# Altium PCB MIFA.PcbDoc (part 5 of 5)
Units mm, origin at the board's own origin, x right, y up, seen from the top; angles counter-clockwise.
Board outline 61 x 65 mm, 6 copper layers (Top Layer, Mid-Layer 1, Mid-Layer 2, Mid-Layer 3, Mid-Layer 4, Bottom Layer), stack 1.538 mm thick; 269 components, 171 nets, 1183 pads, 797 vias.
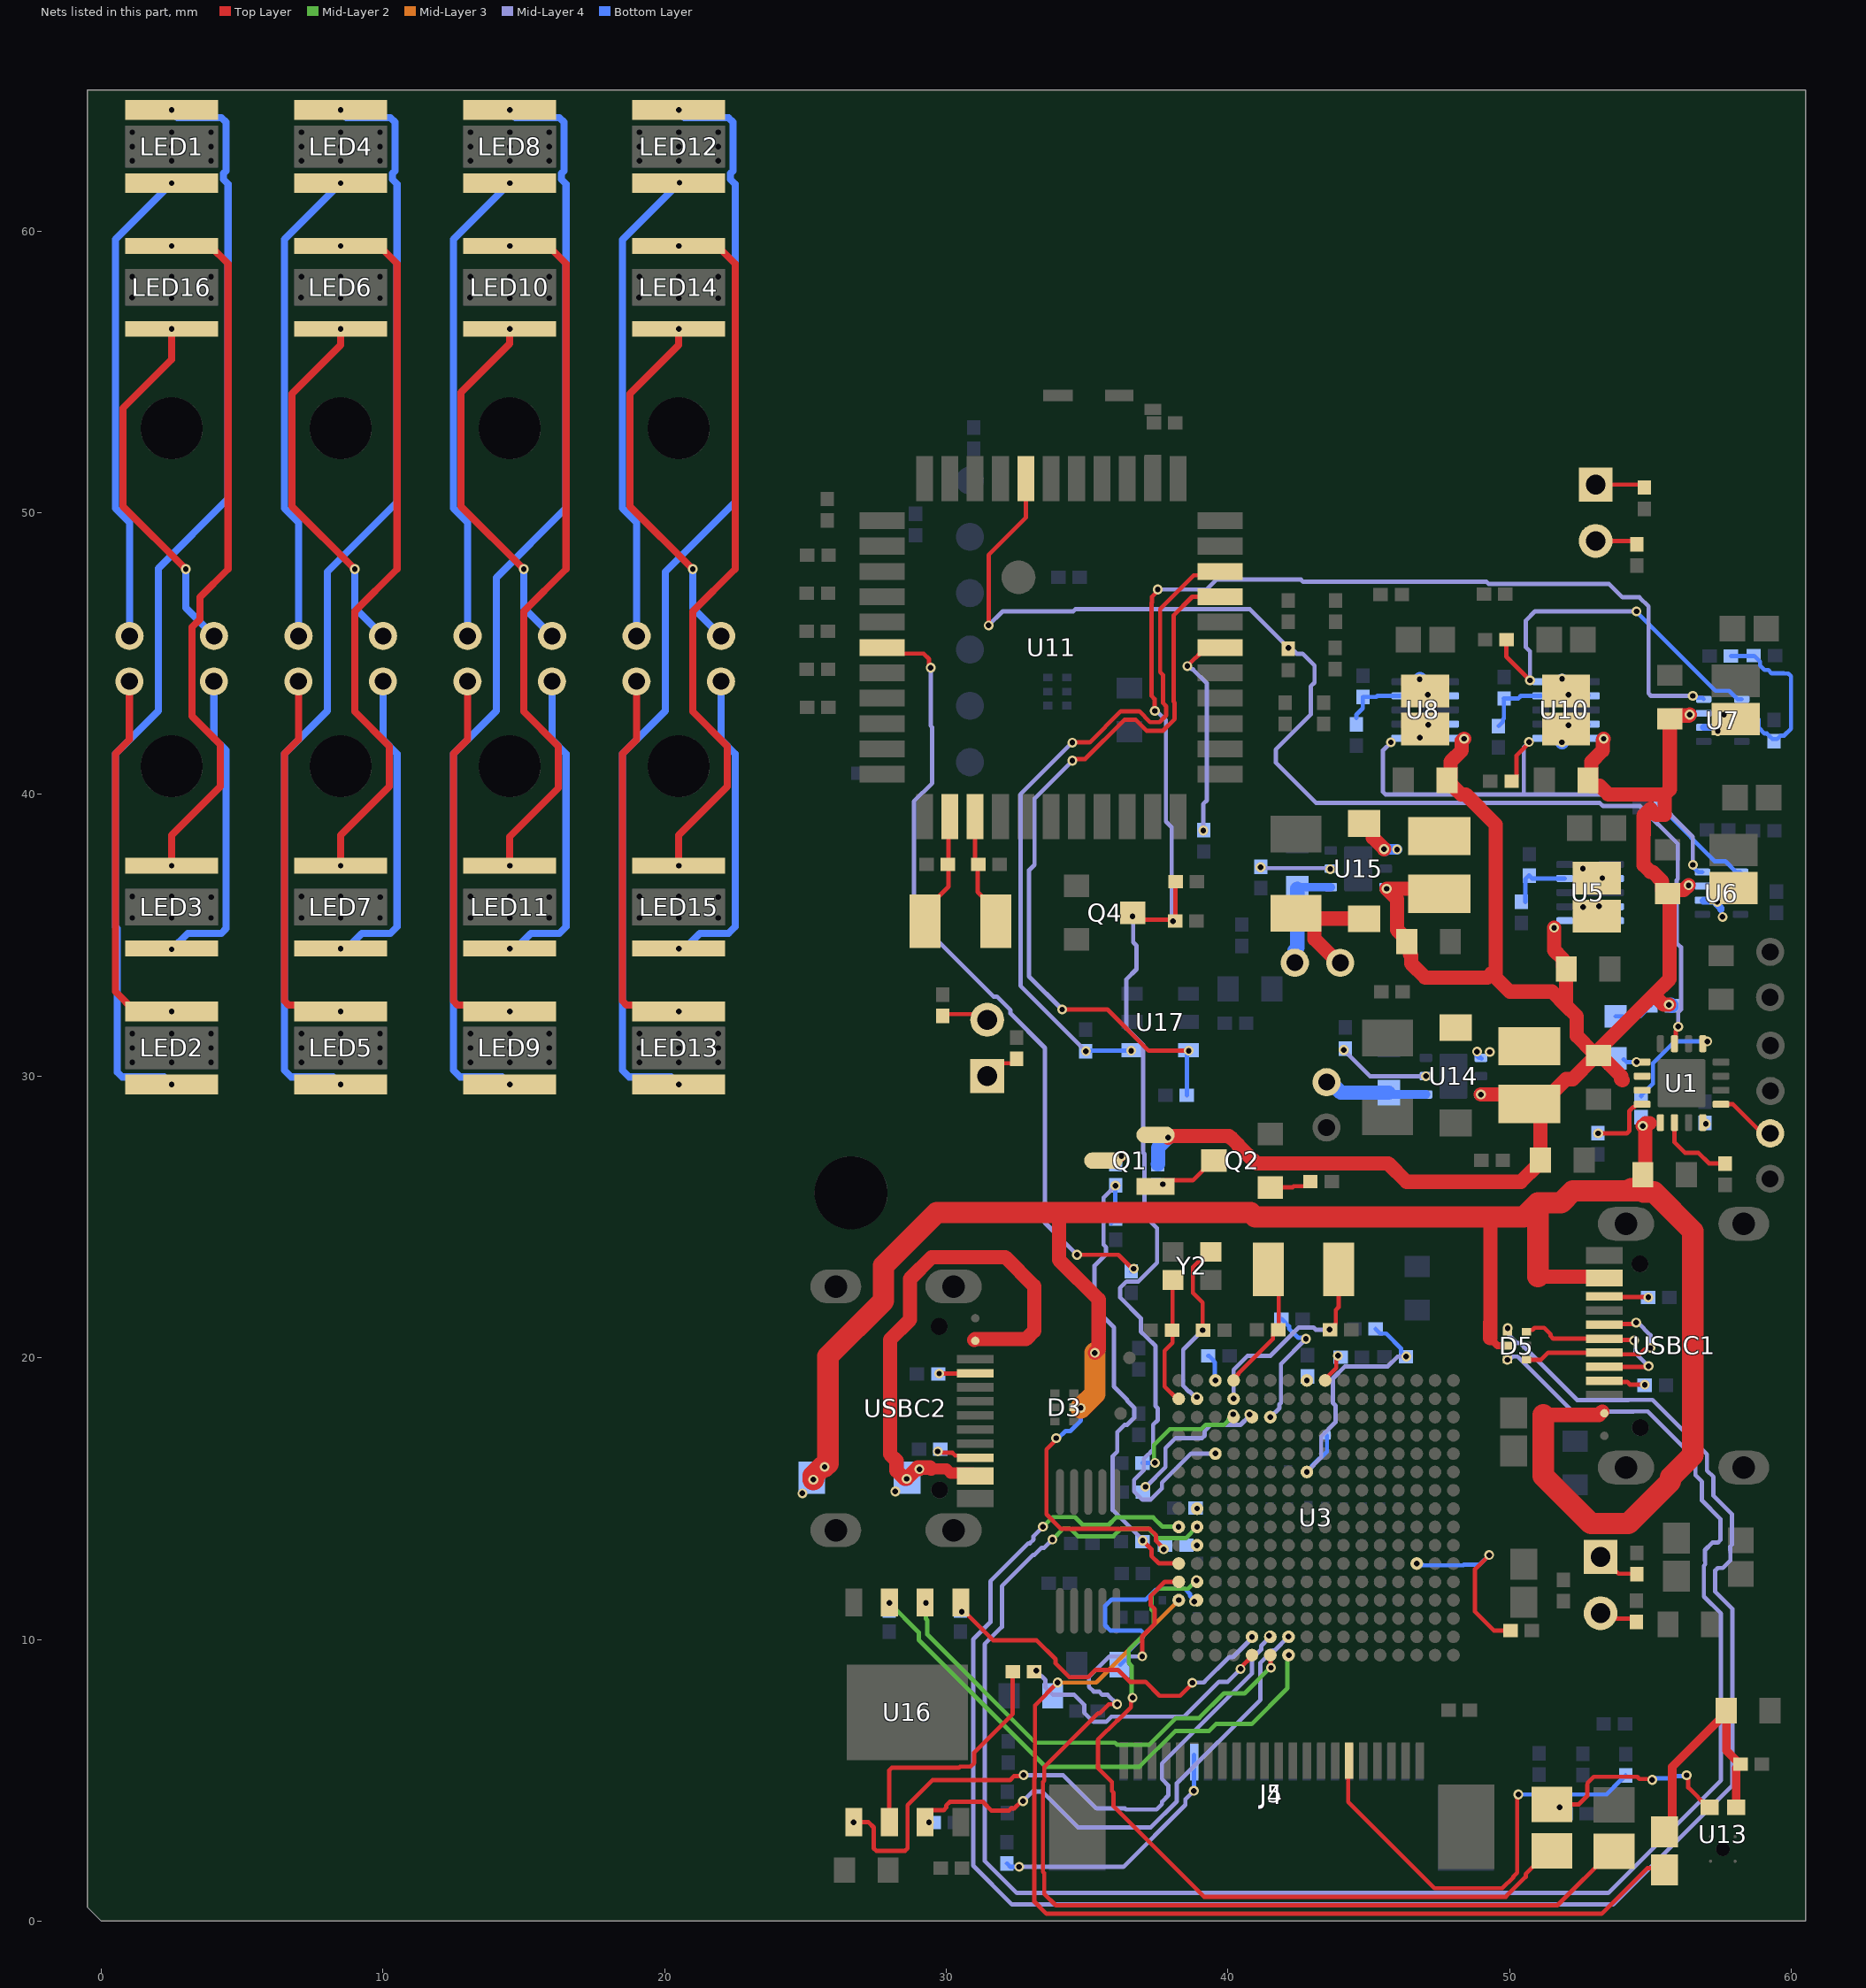
[diagram p7: the nets of this part, all layers, seen from the top]

## Via types
v1: diameter 0.35, hole 0.2, Top Layer to Bottom Layer, tented both sides, 788 vias
v2: diameter 0.35, hole 0.2, Top Layer to Bottom Layer, 9 vias

## Nets (pads, with @x,y where several pads share a name; then routed paths per layer and width w, separated by ;. In a path a pad name is that pad's centre, name@x,y a point inside that pad or via, vN(x,y) a via of type N, cw(c..) or ccw(c..) an arc to the next point about the centre after c; other vN are vias at no path point) (continued)
NetC22_2: C22.2 R26.1 R29.2 U7.2 | length 6.8
  Bottom Layer w0.152: R26.1@57.852,44.914 58.645,44.914 58.654,44.923 58.676,44.923 58.887,44.712 58.887,44.576 59.043,44.42 59.178,44.42 59.3,44.298 59.724,44.298 59.727,44.296 59.883,44.296 59.984,44.194 59.984,42.334 59.742,42.092 59.624,42.092 59.5,41.968 59.319,41.968 59.215,42.072 59.215,42.075 59.126,42.164 59.045,42.164 58.833,42.376 58.833,42.667 58.622,42.878 58.238,42.878 U7.2@58.235,42.881
NetC37_1: C37.1 R33.2 R46.1 U3.H11 | length 9.9
  Mid-Layer 4 w0.152: v1(42.798,15.952) 43.307,16.461 43.307,17.207 43.817,17.717 43.817,18.298 43.722,18.393 43.722,19.268 44.152,19.698 45.671,19.698 46.018,20.046 v1(46.325,20.046)
  Bottom Layer w0.152: v1(42.798,15.952) 42.798,15.97 42.968,16.14 42.968,16.15 43.249,16.431 43.277,16.431 43.51,16.664 C37.1@43.51,17.246 ; R46.1@45.239,21.025 45.399,20.865 45.61,20.865 46.137,20.337 46.137,20.202 46.293,20.046 v1(46.325,20.046)
NetC92_1: C92.1 R59.1 R61.2 U3.A6 | length 17.7
  Top Layer w0.152: v1(36.971,13.512) 37.246,13.238 37.279,13.204 37.279,13.141 37.281,13.139 37.281,12.97 37.551,12.699 U3.A6@38.248,12.699
  Mid-Layer 4 w0.152: v1(36.004,26.113) 35.58,25.689 35.58,24.016 35.671,23.925 35.671,23.682 35.258,23.269 35.258,21.77 35.95,21.077 35.95,18.979 36.421,18.508 36.421,18.476 36.671,18.226 36.671,17.873 36.421,17.623 36.329,17.623 36.069,17.364 36.069,16.673 35.906,16.51 35.906,14.594 36.971,13.529 v1(36.971,13.512)
  Bottom Layer w0.152: R61.2@35.86,24.782 35.86,25.117 35.986,25.117 36,25.131 R59.1@36,26.121 ; C92.1@36.957,13.472 36.971,13.486 v1(36.971,13.512)
NetC95_2: C95.2 C96.1 FB4.1 U13.1 | length 9.2
  Top Layer w0.152: C96.1@57.687,7.399 C96.1@57.687,7.474 ; C95.2@58.041,5.443 C95.2@58.171,5.573
  Top Layer w0.305: FB4.1@55.5,2.775 55.771,3.046 55.771,5.482 57.687,7.399 57.687,6.057 C95.2@58.171,5.573 ; U13.1@58.041,4.044 C95.2@58.041,5.443
NetC97_1: C97.1 C98.1 U13.2 | length 7.1
  Top Layer w0.152: C97.1@51.5,4.15 51.776,4.15 52.454,4.15 52.752,4.449 52.752,4.845 52.762,4.855 52.762,4.901 52.986,5.125 54.527,5.125 54.603,5.049 55.026,5.049 v1(55.057,5.018) ; v1(56.279,5.183) 56.336,5.126 56.336,4.747 57.039,4.044 U13.2@57.091,4.044
  Bottom Layer w0.152: v1(55.057,5.018) 55.11,5.072 55.749,5.072 55.825,5.148 56.243,5.148 v1(56.279,5.183)
  other v1: 51.776,4.04
NetC97_2: C97.2 U3.B5 | length 28.1
  Top Layer w0.152: v1(36.612,7.932) 36.555,7.876 36.555,7.591 36.089,7.126 36.063,7.126 35.378,6.442 35.378,5.444 35.879,4.944 35.879,4.621 35.939,4.561 35.939,4.078 39.15,0.867 49.86,0.867 50.568,1.575 50.568,1.668 51.4,2.5 C97.2@51.5,2.5
  Mid-Layer 2 w0.152: v1(36.612,7.932) 36.573,7.971 36.573,9.069 36.473,9.17 36.473,9.631 36.826,9.984 37.36,10.517 37.36,10.981 37.281,11.06 37.281,11.573 37.508,11.8 38.575,11.8 v1(38.876,12.102)
NetC99_1: C99.1 C100.1 U3.B4 | length 7.3
  Bottom Layer w0.152: C99.1@36.174,9.106 36.473,9.405 36.473,9.585 36.826,9.938 36.994,10.106 36.994,10.232 36.905,10.321 35.82,10.321 35.635,10.507 35.635,11.185 35.87,11.42 37.084,11.42 37.435,11.771 37.478,11.771 37.508,11.8 38.469,11.8 38.65,11.619 38.65,11.55 C100.1@38.796,11.404 ; v1(38.797,11.349) 38.877,11.349 C100.1@38.892,11.364
NetC101_2: C101.2 U3.A5 | length 36.6
  Top Layer w0.152: v1(36.063,7.703) 35.765,7.703 35.436,7.374 35.374,7.374 33.478,5.478 33.478,4.994 33.428,4.944 33.428,1.757 33.478,1.707 33.478,0.969 33.882,0.564 51.692,0.564 53.603,2.476 C101.2@53.703,2.476 ; v1(36.955,9.402) 36.955,10.114 37.399,10.559 37.399,11.073 37.256,11.216 37.256,11.548 37.751,12.043 38.243,12.043 U3.A5@38.249,12.049
  Mid-Layer 4 w0.152: v1(36.063,7.703) 35.727,8.039 35.539,8.039 35.426,8.152 35.229,8.152 35.063,8.318 35.063,8.671 35.789,9.397 36.95,9.397 v1(36.955,9.402)
NetC103_1: C103.1 U14.2 | length 3.3
  Mid-Layer 4 w0.152: v1(44.106,30.928) 45.034,30 v1(47.025,30)
NetC104_1: C104.1 D8.1 J2.1 | length 4.5
  Top Layer w0.508: C104.1@42.418,35.788 42.613,35.593 42.941,35.593 D8.1@44.769,35.593 ; C104.1@42.738,35.593 42.863,35.593 43.067,35.39 43.067,34.866 J2.1@43.899,34.034
NetC107_1: C107.1 U15.2 | length 2.5
  Mid-Layer 4 w0.152: v1(41.156,37.414) 41.188,37.381 43.598,37.381 v1(43.63,37.349)
  Bottom Layer w0.152: U15.2@43.586,37.348 U15.2@43.588,37.348
NetC111_2: C111.2 U11.24 Y3.1 | length 4.1
  Top Layer w0.152: Y3.1@29.25,35.5 29.25,35.9 30.076,36.726 30.076,37.517 30.076,39.172 U11.24@30.121,39.218
NetC112_1: C112.1 U11.25 Y3.2 | length 4
  Top Layer w0.152: U11.25@31.021,39.218 31.021,37.605 31.113,37.512 31.113,36.537 31.75,35.9 Y3.2@31.75,35.5
NetCB1_1: CB1.1 CB2.1 FB4.2 U3.A4 | length 36.8
  Top Layer w0.152: v1(33.953,8.47) 33.144,7.662 33.144,5.088 33.125,5.069 33.125,0.69 33.554,0.262 53.262,0.262 54.882,1.882 55.157,1.882 FB4.2@55.346,2.071
  Mid-Layer 3 w0.152: v1(33.953,8.47) 35.32,8.47 v1(38.249,11.399)
  Bottom Layer w0.152: CB2.1@38.213,11.399 v1(38.249,11.399)
NetD1_1: D1.1 U1.9 | length 0.5
  Bottom Layer w0.152: D1.1@54.041,30.6 54.141,30.5 v1(54.5,30.5)
NetD1_2: D1.2 R12.1 | length 1.4
  Bottom Layer w0.152: D1.2@53.758,32.124 54.624,32.124 54.819,32.319 54.819,32.34 54.979,32.5 R12.1@55,32.5
NetD2_2: D2.2 USBC2.A4B9 USBC2.B4A9 | length 19.5
  Top Layer w0.4: 29.459,16.06 29.997,16.06 30.153,15.905 30.926,15.905 USBC2.B4A9@31.026,15.805
  Top Layer w0.508: v1(29.042,16.047) v1@28.984,16.105 ; 29.459,16.06 29.414,16.105 v1@28.984,16.105 ; USBC2.A4B9@30.987,20.633 31.015,20.661 32.823,20.661 33.121,20.959 33.121,22.543 32.089,23.575 29.481,23.575 28.709,22.802 28.709,21.353 28,20.644 28,16.579 28.232,16.348 28.232,15.993 28.519,15.705 v1(28.59,15.705) 28.984,16.099 v1@28.984,16.105
  other v1: 28.187,15.254
NetD7_2: D7.2 L6.2 U14.4 | length 0.4
  Bottom Layer w0.152: v1@48.826,30.896 48.826,30.724 48.9,30.65 U14.4@48.975,30.65 U14.4@48.999,30.626
  other v1: 48.837,30.872 49.288,30.861
NetD8_2: D8.2 L7.2 U15.4 | length 1.6
  Top Layer w0.508: D8.2@44.952,38.943 45.146,38.749 45.146,38.463 45.536,38.072 v1(45.536,38.058)
  Bottom Layer w0.381: v1(45.536,38.058) 45.581,38.013 U15.4@45.596,38.013 ; U15.4@45.596,38.013 45.63,38.048 v1(46.001,38.048)
NetJ1_2: J1.2 R66.2 U14.1 | length 3.7
  Bottom Layer w0.152: R66.2@45.706,29.415 R66.2@45.77,29.35
  Bottom Layer w0.305: R66.2@45.77,29.35 U14.1@47.025,29.35
  Bottom Layer w0.508: J1.2@43.5,29.787 43.633,29.787 44.006,29.415 R66.2@45.706,29.415
NetJ2_2: J2.2 R68.2 U15.1 | length 3.9
  Bottom Layer w0.152: R68.2@42.461,36.654 R68.2@42.521,36.713
  Bottom Layer w0.305: R68.2@42.521,36.713 U15.1@43.646,36.713
  Bottom Layer w0.508: J2.2@42.264,34.012 42.359,34.106 42.359,34.453 42.461,34.556 R68.2@42.461,36.654
NetJ3_1: J3.1 LED1.1 | length 17.1
  Bottom Layer w0.254: J3.1@1.004,45.625 1.004,49.656 0.5,50.16 0.5,59.702 v1(2.5,61.702)
NetJ3_2: J3.2 LED2.2 | length 13.5
  Top Layer w0.254: J3.2@1,44.013 1,41.942 0.5,41.442 0.5,33.001 1.201,32.3 v1(2.5,32.3)
NetJ4_17: J4.17 R13.1 | length 9.2
  Mid-Layer 4 w0.152: v1(32.584,1.929) 36.284,1.929 38.486,4.131 38.486,4.33 v1(38.785,4.628)
  Bottom Layer w0.152: R13.1@32.151,2.047 32.269,1.929 v1(32.584,1.929) ; v1(38.785,4.628) 38.79,4.633 38.79,5.9 J4.17@38.795,5.905
NetJ5_17: J5.17 R16.1 | length 16.1
  Top Layer w0.152: J5.17@44.263,5.918 44.263,4.237 47.331,1.169 49.735,1.169 50.134,1.568 50.134,1.591 50.266,1.722 50.266,4.456 v1(50.308,4.498)
  Bottom Layer w0.152: v1(50.308,4.498) 53.435,4.498 53.932,4.995 53.953,4.995 54.113,5.155 R16.1@54.113,5.177
NetJ6_1: J6.1 LED16.3 | length 13
  Top Layer w0.254: v1(2.5,56.529) 2.5,55.442 0.773,53.715 0.773,50.227 v1(3,48)
  Bottom Layer w0.254: v1(3,48) 3,46.63 J6.1@4.004,45.625
NetJ6_2: J6.2 LED3.1 | length 11.2
  Bottom Layer w0.254: v1(2.5,34.5) 3.073,35.073 4.264,35.073 4.427,35.235 4.427,41.573 4,42 J6.2@4,44.013
NetJ7_1: J7.1 LED4.1 | length 17.1
  Bottom Layer w0.254: J7.1@7.004,45.625 7.004,49.656 6.5,50.16 6.5,59.702 v1(8.5,61.702)
NetJ7_2: J7.2 LED5.2 | length 13.7
  Top Layer w0.254: J7.2@7,44.013 7,41.942 6.5,41.442 6.5,32.673 6.649,32.524 8.276,32.524 v1(8.5,32.3)
NetJ8_1: J8.1 LED6.3 | length 13
  Top Layer w0.254: v1(8.5,56.529) 8.5,55.956 6.773,54.229 6.773,50.227 v1(9,48)
  Bottom Layer w0.254: v1(9,48) 9,46.63 J8.1@10.004,45.625
NetJ8_2: J8.2 LED7.1 | length 11.2
  Bottom Layer w0.254: v1(8.5,34.529) 8.538,34.567 8.741,34.567 9.247,35.073 10.264,35.073 10.5,35.308 10.5,41.442 10,41.942 J8.2@10,44.013
NetJ9_1: J9.1 LED8.1 | length 17.1
  Bottom Layer w0.254: J9.1@13.004,45.625 13.004,49.655 12.5,50.16 12.5,59.702 v1(14.5,61.702)
NetJ9_2: J9.2 LED9.2 | length 13.7
  Top Layer w0.254: J9.2@13,44.013 13,41.942 12.5,41.442 12.5,32.673 12.649,32.524 14.276,32.524 v1(14.5,32.3)
NetJ10_1: J10.1 LED10.3 | length 13
  Top Layer w0.254: v1(14.5,56.529) 14.5,56 12.773,54.273 12.773,50.227 v1(15,48)
  Bottom Layer w0.254: v1(15,48) 15,46.63 J10.1@16.004,45.625
NetJ10_2: J10.2 LED11.1 | length 11.2
  Bottom Layer w0.254: v1(14.5,34.529) 14.538,34.567 14.741,34.567 15.247,35.073 16.264,35.073 16.5,35.308 16.5,41.442 16,41.942 J10.2@16,44.013
NetJ11_1: J11.1 LED12.1 | length 17.1
  Bottom Layer w0.254: J11.1@19.004,45.625 19.004,49.655 18.5,50.16 18.5,59.688 v1(20.529,61.717)
NetJ11_2: J11.2 LED13.2 | length 13.7
  Top Layer w0.254: J11.2@19,44.013 19,41.942 18.5,41.442 18.5,32.673 18.649,32.524 20.276,32.524 v1(20.5,32.3)
NetJ12_1: J12.1 LED14.3 | length 13
  Top Layer w0.254: v1(20.5,56.529) 20.5,55.956 18.773,54.229 18.773,50.227 v1(21,48)
  Bottom Layer w0.254: v1(21,48) 21,46.63 J12.1@22.004,45.625
NetJ12_2: J12.2 LED15.1 | length 11.2
  Bottom Layer w0.254: v1(20.5,34.529) 20.538,34.567 20.741,34.567 21.247,35.073 22.264,35.073 22.5,35.308 22.5,41.442 22,41.942 J12.2@22,44.013
NetJT_1: JT.1 U1.1 | length 2.3
  Top Layer w0.152: U1.1@57.5,29 57.925,29 JT.1@59.237,27.688
NetL1_1: L1.1 U6.6 | length 0.9
  Bottom Layer w0.152: U6.6@56.84,36.245 U6.6@56.864,36.221
  Bottom Layer w0.254: U6.6@56.864,36.221 57.275,36.221 57.337,36.158 v1@57.337,36.108 ; v1(57.365,36.188) 57.365,36.122 v1@57.351,36.108 ; 57.498,35.921 57.498,35.962 v1@57.351,36.108 ; v1@57.337,36.108 v1@57.351,36.108 ; v1@57.337,36.108 v1@57.351,36.108
  other v1: 57.556,35.653
NetL2_1: L2.1 U7.6 | length 0.7
  Bottom Layer w0.152: 57.227,42.332 57.305,42.253 v1(57.386,42.253)
  Bottom Layer w0.254: U7.6@56.885,42.381 57.205,42.381 57.333,42.253 v1(57.386,42.253)
  other v1: 57.605,42.828
NetL3_1: L3.1 U5.7 | length 1.1
  Bottom Layer w0.305: v1@52.709,37.271 52.709,37.175 52.854,37.03 v1(53.286,37.03) 53.589,37.03 U5.7@53.603,37.016
  other v1: 52.596,37.366
NetL3_2: L3.2 U5.9 | length 1.4
  Bottom Layer w0.305: v1@52.702,35.902 52.808,36.009 53.15,36.009 53.178,36.037 53.188,36.026 U5.9@53.592,36.026 ; v1(53.174,36.037) 53.185,36.026 U5.9@53.592,36.026 ; U5.9@53.592,36.026 U5.9@53.603,36.016 U5.9@53.592,36.026
  other v1: 52.603,36
NetL4_1: L4.1 U8.7 | length 1.3
  Bottom Layer w0.152: U8.7@47.73,43.52 U8.7@47.75,43.5
  Bottom Layer w0.254: v1@47.108,43.52 U8.7@47.73,43.52
  Bottom Layer w0.508: v1@46.812,44.089 46.853,44.048 46.853,43.759 47.072,43.541 v1(47.087,43.541)
  other v1: 46.802,44.089
NetL4_2: L4.2 U8.9 | length 1.3
  Bottom Layer w0.152: U8.9@47.725,42.475 U8.9@47.75,42.5
  Bottom Layer w0.254: v1(47.104,42.471) 47.13,42.471 47.184,42.525 47.674,42.525 U8.9@47.725,42.475
  Bottom Layer w0.508: v1(46.804,42.016) 46.804,42.171 v1(47.104,42.471)
NetL5_1: L5.1 U10.7 | length 1.3
  Bottom Layer w0.152: v1@51.86,44.024 v1(51.86,44.105) ; v1@52.031,43.598 v1(52.087,43.541) ; U10.7@52.73,43.52 U10.7@52.75,43.5
  Bottom Layer w0.254: v1@52.108,43.52 U10.7@52.73,43.52
  Bottom Layer w0.508: v1@51.86,44.024 51.86,43.768 v1@52.031,43.598
NetL5_2: L5.2 U10.9 | length 1.4
  Bottom Layer w0.152: U10.9@52.73,42.48 U10.9@52.75,42.5
  Bottom Layer w0.254: v1@52.108,42.48 U10.9@52.73,42.48
  Bottom Layer w0.508: v1(51.854,41.853) 51.854,42.226 v1(52.087,42.459)
NetLED1_2: LED1.2 LED2.1 | length 39.8
  Bottom Layer w0.254: v1(2.5,29.702) 2.23,29.972 0.736,29.972 0.573,30.135 0.573,35.235 0.5,35.308 0.5,41.442 2.023,42.965 2.023,48.023 4.5,50.5 4.5,61.675 4.339,61.836 4.339,62.046 4.427,62.135 4.427,63.865 4.264,64.028 2.697,64.028 2.518,64.206 2.518,64.282 v1(2.5,64.3)
NetLED3_3: LED3.3 LED16.1 | length 25.3
  Top Layer w0.254: v1(2.5,37.471) 2.5,38.558 4.227,40.285 4.227,41.773 3.223,42.777 3.223,45.943 3.5,46.22 3.5,47 4.5,48 4.5,58.841 3.87,59.471 v1(2.5,59.471)
NetLED4_2: LED4.2 LED5.1 | length 39.8
  Bottom Layer w0.254: v1(8.5,29.702) 8.23,29.972 6.736,29.972 6.5,30.208 6.5,41.442 8.023,42.965 8.023,47.907 10.5,50.384 10.5,61.675 10.339,61.836 10.339,62.046 10.427,62.135 10.427,63.865 10.264,64.028 8.697,64.028 8.518,64.206 8.518,64.282 v1(8.5,64.3)
NetLED6_1: LED6.1 LED7.3 | length 25.5
  Top Layer w0.254: v1(8.5,37.471) 8.5,38.558 10.227,40.285 10.227,41.715 9,42.942 9,46.5 10.5,48 10.5,58.841 9.87,59.471 v1(8.5,59.471)
NetLED8_2: LED8.2 LED9.1 | length 39.8
  Bottom Layer w0.254: v1(14.5,29.702) 14.23,29.972 12.736,29.972 12.5,30.208 12.5,41.442 14.023,42.965 14.023,47.698 16.5,50.175 16.5,61.675 16.339,61.836 16.339,62.046 16.427,62.135 16.427,63.865 16.264,64.028 14.697,64.028 14.518,64.206 14.518,64.282 v1(14.5,64.3)
NetLED10_1: LED10.1 LED11.3 | length 25.5
  Top Layer w0.254: v1(14.5,37.471) 14.5,38.5 16.227,40.227 16.227,41.715 15,42.942 15,46.5 16.5,48 16.5,58.841 15.87,59.471 v1(14.5,59.471)
NetLED12_2: LED12.2 LED13.1 | length 39.8
  Bottom Layer w0.254: v1(20.5,29.702) 20.23,29.972 18.736,29.972 18.5,30.208 18.5,41.442 20.023,42.965 20.023,47.907 22.5,50.384 22.5,61.675 22.339,61.836 22.339,62.046 22.427,62.135 22.427,63.865 22.264,64.028 20.697,64.028 20.518,64.206 20.518,64.282 v1(20.5,64.3)
NetLED14_1: LED14.1 LED15.3 | length 25.5
  Top Layer w0.254: v1(20.5,37.471) 20.5,38.558 22.227,40.285 22.227,41.715 21,42.942 21,46.5 22.5,48 22.5,58.841 21.87,59.471 v1(20.5,59.471)
NetQ1_1: Q1.1 Q2.3 R58.1 | length 2.6
  Top Layer w0.152: Q1.1@37.427,26.085 Q1.1@37.505,26.163 ; v1(37.682,26.163) Q1.1@37.505,26.163 ; Q2.3@39.5,27 39.45,27 38.752,26.302 37.644,26.302 Q1.1@37.505,26.163
NetQ1_3: Q1.3 R59.2 | length 1.1
  Top Layer w0.152: Q1.3@35.573,27 35.597,27.023 Q1.3@36.216,27.023 ; v1(36.216,27.156) Q1.3@36.216,27.023 ; v1@36.273,27.294 36.273,27.123 36.294,27.102 Q1.3@36.216,27.023
NetQ2_1: Q2.1 R60.1 | length 1.5
  Top Layer w0.152: Q2.1@41.5,26.05 42.289,26.05 42.329,26.09 42.765,26.09 R60.1@42.925,26.25
NetR1_2: R1.2 USBC2.A5 | length 1.4
  Top Layer w0.152: v1(29.745,19.44) 31.069,19.44 USBC2.A5@31.09,19.461
NetR4_2: R4.2 USBC1.A5 | length 1.6
  Top Layer w0.152: USBC1.A5@53.29,19.146 54.169,19.146 54.265,19.049 54.791,19.049 v1(54.795,19.046)
  Bottom Layer w0.152: R4.2@54.789,19.02 54.795,19.026 v1(54.795,19.046)
NetR5_1: R5.1 U1.12 | length 2.4
  Top Layer w0.152: v1(53.137,27.968) 54.156,27.968 54.245,28.058 54.245,28.761 54.383,28.899 54.424,28.899 54.525,29 U1.12@54.7,29
NetR6_1: R6.1 U3.C16 | length 1
  Bottom Layer w0.152: R6.1@39.296,20.075 39.318,20.075 39.478,19.915 39.478,19.894 39.529,19.842 39.529,19.22 v1(39.549,19.2)
NetR7_2: R7.2 U1.16
  other v1: 56.962,28.308
NetR8_1: R8.1 U1.5 | length 3.8
  Top Layer w0.152: U1.5@56.85,31.15 56.932,31.232 v1(57.014,31.232)
  Bottom Layer w0.152: R8.1@54.667,29.292 54.667,29.313 55.083,29.73 55.083,30.464 55.851,31.232 v1(57.014,31.232)
NetR9_2: R9.2 USBC1.B5 | length 1.6
  Top Layer w0.152: USBC1.B5@53.359,22.182 53.377,22.163 54.9,22.163 v1(54.918,22.145)
  Bottom Layer w0.152: R9.2@54.871,22.157 54.883,22.145 v1(54.918,22.145)
NetR11_2: R11.2 USBC2.B5 | length 1.3
  Top Layer w0.152: v1(29.696,16.678) 29.734,16.64 29.872,16.64 29.884,16.629 30.215,16.629 30.315,16.529 30.83,16.529 USBC2.B5@30.904,16.455
NetR20_2: R20.2 U3.D14 | length 4.4
  Mid-Layer 2 w0.152: v1(37.404,16.274) 37.371,16.307 37.371,16.91 37.931,17.47 39.053,17.47 39.209,17.625 39.863,17.625 40.01,17.772 40.01,17.808 40.18,17.978 v1(40.18,17.996)
  Bottom Layer w0.152: R20.2@36.962,16.261 36.975,16.274 v1(37.404,16.274)
NetR21_2: R21.2 U1.14 | length 2.8
  Top Layer w0.152: U1.14@55.85,28.35 55.85,27.65 56.225,27.275 56.702,27.275 57.075,26.902 R21.2@57.651,26.902
NetR22_1: R22.1 R24.2 U5.4 | length 2.3
  Bottom Layer w0.152: R24.2@50.55,36.188 50.55,36.99 50.685,37.125 50.794,37.016 U5.4@51.953,37.016
NetR27_1: R27.1 U6.8 U8.1 U10.1 | length 18.6
  Top Layer w0.152: R27.1@50.064,40.477 50.086,40.477 50.246,40.638 50.246,41.39 50.684,41.829 v1(50.684,41.862)
  Mid-Layer 4 w0.152: v1(45.782,41.85) 45.5,41.568 45.5,40.089 45.589,40 50.5,40 ; v1(50.684,41.862) 50.684,41.858 50.5,41.674 50.5,40 ; v1(56.501,37.5) 56.5,37.501 56.5,38.5 55,40 50.5,40
  Bottom Layer w0.152: v1(56.501,37.5) 56.501,37.434 56.69,37.245 U6.8@56.84,37.245
NetR37_2: R37.2 U3.P6 | length 6.5
  Top Layer w0.152: v1(49.269,13) 48.766,12.497 48.766,10.984 49.431,10.319 R37.2@50.025,10.319
  Bottom Layer w0.152: v1(46.704,12.698) 46.761,12.641 46.935,12.641 46.942,12.635 48.351,12.635 48.373,12.657 48.926,12.657 v1(49.269,13)
NetR42_1: R42.1 U3.E1 | length 9.8
  Top Layer w0.152: v1(40.445,8.955) 40.445,8.999 40.85,9.404 U3.E1@40.85,9.451
  Mid-Layer 4 w0.152: v1(33.198,8.891) 33.198,8.885 33.516,8.567 33.516,8.305 33.776,8.044 34.532,8.044 34.892,7.684 34.892,7.405 35.218,7.078 35.673,7.078 35.856,7.262 38.44,7.262 39.678,8.5 39.99,8.5 v1(40.445,8.955)
NetR45_1: R45.1 U3.F14 | length 4.5
  Mid-Layer 4 w0.152: v1(41.504,17.889) 41.504,17.892 41.824,18.211 41.824,18.341 41.876,18.393 41.876,19.785 v1(42.765,20.675)
  Bottom Layer w0.152: R45.1@41.908,21.375 42.166,21.117 42.166,21.039 42.493,20.712 42.728,20.712 v1(42.765,20.675)
NetR47_1: R47.1 U3.J16 | length 1.1
  Top Layer w0.152: U3.J16@43.448,19.199 43.448,19.245 43.843,19.639 43.843,20.018 v1(43.9,20.075)
NetR48_1: R48.1 U3.H16
  other v1: 42.794,19.197
NetR50_1: R50.1 R55.2 U8.4 | length 2.2
  Bottom Layer w0.152: R55.2@44.55,42.714 44.55,42.825 44.785,43.06 44.785,43.463 45.267,43.463 45.305,43.5 U8.4@46.1,43.5
NetR51_1: R51.1 U6.1 | length 3.8
  Bottom Layer w0.152: R51.1@55.5,39.667 55.55,39.617 55.55,39.356 57.274,37.632 57.652,37.632 58.04,37.245 U6.1@58.19,37.245
NetR53_1: R53.1 U3.E14 | length 5.3
  Mid-Layer 4 w0.152: v1(37.067,15.422) 37.084,15.422 37.78,16.118 37.78,16.791 38.139,17.15 39.084,17.15 39.173,17.239 39.173,17.404 39.393,17.625 39.914,17.625 39.919,17.62 40.44,17.62 40.76,17.94 v1(40.76,17.988)
NetR54_2: R54.2 U11.17 | length 28.1
  Top Layer w0.152: U11.17@27.721,45.218 28.222,45.218 28.439,45 29.194,45 29.386,44.808 29.386,44.556 v1(29.443,44.499) ; v1(34.636,23.66) 36.106,23.66 36.602,23.164 v1(36.652,23.164)
  Mid-Layer 4 w0.152: v1(29.443,44.499) 29.443,42.438 29.5,42.381 29.5,40.401 28.849,39.75 28.849,35.651 31.674,32.826 31.792,32.826 32.276,32.342 32.276,32.224 33.5,31 33.5,24.796 v1(34.636,23.66)
  Bottom Layer w0.152: R54.2@36.566,23.069 36.652,23.154 v1(36.652,23.164)
NetR56_1: R56.1 R69.2 U10.4 | length 2.4
  Bottom Layer w0.152: R69.2@49.603,42.428 49.763,42.588 49.763,42.667 49.794,42.699 R56.1@49.794,43.406 ; R56.1@49.788,43.409 50.306,43.409 50.396,43.5 U10.4@51.1,43.5
NetR62_1: R62.1 U3.B9
  other v1: 38.9,14.65
NetR63_1: R63.1 U3.B7
  other v1: 38.899,13.343
NetRB1_1: RB1.1 S1.1 | length 1.3
  Top Layer w0.152: S1.1@53.46,12.74 53.865,12.335 RB1.1@54.611,12.335
NetRB2_1: RB2.1 S1.2 | length 1.1
  Top Layer w0.152: S1.2@53.46,10.74 54.372,10.74 RB2.1@54.494,10.618
NetRB3_1: RB3.1 S2.1 | length 1.3
  Top Layer w0.152: S2.1@31.45,30 31.908,30.458 32.334,30.458 RB3.1@32.494,30.618
NetRB4_1: RB4.1 S2.2 | length 1.1
  Top Layer w0.152: RB4.1@29.877,32.137 29.941,32.201 S2.2@30.974,32.201
NetRB5_1: RB5.1 S3.1 | length 1.3
  Top Layer w0.152: S3.1@53.55,51 54.67,51 RB5.1@54.773,50.896
NetRB6_1: RB6.1 S3.2 | length 1
  Top Layer w0.152: S3.2@53.55,49 54.388,49 RB6.1@54.506,48.882
NetRBT1_2: RBT1.2 U11.39 | length 7.7
  Top Layer w0.152: v1(38.558,44.555) 38.558,44.576 38.826,44.844 38.847,44.844 38.996,44.993 39.22,45.218 U11.39@39.72,45.218
  Mid-Layer 4 w0.152: v1(38.558,44.555) 38.611,44.555 38.725,44.441 38.757,44.441 39.247,43.95 39.247,39.789 39.12,39.662 v1(39.121,38.72)
PG_1V8: R28.1 U7.1 U10.5 | length 13.1
  Top Layer w0.152: R28.1@49.879,45.5 49.879,44.889 v1(50.717,44.05)
  Mid-Layer 4 w0.152: v1(50.717,44.05) 50.717,45.082 50.574,45.225 50.574,46.177 50.897,46.5 v1(54.5,46.5)
  Bottom Layer w0.152: v1(54.5,46.5) 54.5,46.479 57.298,43.681 57.785,43.681 58.085,43.381 U7.1@58.235,43.381
PGOOD: R23.2 U1.7 U11.7 | length 45.2
  Top Layer w0.152: v1(31.5,46) 31.5,48.5 32.821,49.821 U11.7@32.821,51.217 ; U1.7@55.85,31.15 55.899,31.199 55.899,31.599 55.978,31.678 v1(55.978,31.759)
  Mid-Layer 4 w0.152: v1(31.5,46) 32,46.5 34.5,46.5 34.576,46.576 40.775,46.576 v1(42.144,45.207) 42.224,45.207 42.435,44.995 42.646,44.995 43.07,44.571 43.07,43.972 42.936,43.837 42.936,42.833 41.692,41.589 41.692,41.133 43.127,39.698 53.202,39.698 53.309,39.591 54.618,39.591 55.962,38.246 55.962,36.994 55.922,36.953 55.922,34.735 56.078,34.579 56.078,32.36 55.978,32.26 v1(55.978,31.759)
RSTN: C23.1 Q4.3 R30.2 U3.C12 U7.8 | length 65
  Top Layer w0.152: v1(36.608,35.667) 36.617,35.675 Q4.3@36.746,35.675 ; Q4.3@36.622,35.799 Q4.3@36.746,35.675 ; v1(37.401,42.966) 37.393,42.975 37.393,43.389 37.286,43.496 37.286,46.8 37.295,46.809 37.295,47.017 37.504,47.226 v1(37.504,47.279) ; v1(38.047,35.5) 38.024,35.524 38.136,35.636 R30.2@38.136,36.902 ; C23.1@38.05,35.55 37.95,35.55 37.941,35.559 36.862,35.559 Q4.3@36.746,35.675
  Mid-Layer 4 w0.152: v1(36.608,35.667) 36.634,35.641 36.634,34.753 36.75,34.637 36.75,33.795 36.394,33.439 36.394,31.694 36.988,31.1 36.988,27.28 37.035,27.233 37.035,25.052 37.481,24.606 37.481,23.378 36.816,22.713 36.4,22.713 36.165,22.478 36.165,22.145 36.907,21.403 36.907,20.932 37.101,20.738 37.108,20.738 37.426,20.419 37.426,20.165 37.426,18.288 37.505,18.209 37.505,17.791 37.339,17.625 37.339,16.736 37.281,16.678 37.177,16.574 37.172,16.574 37.011,16.413 37.011,16.007 36.666,15.662 36.666,15.256 36.961,14.961 37.251,14.961 37.654,15.363 37.654,15.564 38.694,16.604 v1(39.556,16.604) ; v1(37.401,42.966) 37.454,42.966 37.651,42.77 37.668,42.77 37.795,42.642 37.795,39.041 38,38.837 38,35.547 v1(38.047,35.5) ; v1(37.504,47.279) 39.237,47.279 39.586,47.627 42.591,47.627 42.665,47.553 49.17,47.553 49.244,47.479 53.521,47.479 54,47 54.603,47 54.926,46.677 54.926,43.589 55.015,43.5 v1(56.5,43.5)
  Bottom Layer w0.152: v1(56.5,43.5) 56.581,43.5 56.651,43.429 56.836,43.429 U7.8@56.885,43.381
SPI_CLK: R42.2 U16.6 | length 8.8
  Top Layer w0.152: U16.6@27.979,3.513 27.975,3.517 27.975,5.358 28.064,5.447 30.447,5.447 30.487,5.487 30.858,5.487 30.99,5.62 30.99,5.99 32.357,7.357 R42.2@32.357,8.862
SPI_CS: R39.1 U3.E2 U16.1 | length 12.8
  Top Layer w0.152: v1(30.545,10.984) 30.648,10.984 31.664,9.967 33.208,9.967 33.88,9.295 33.88,9.146 34.365,8.661 35.032,8.661 35.291,8.92 36.095,8.92 36.515,8.5 37.066,8.5 37.566,8 38.298,8 38.734,8.436 v1(38.734,8.462)
  Mid-Layer 4 w0.152: v1(38.734,8.462) 38.744,8.472 39.138,8.472 39.166,8.5 40.042,9.376 40.175,9.376 40.85,10.051 v1(40.85,10.094)
SPI_IO0: U3.F2 U16.5 | length 22.1
  Top Layer w0.152: v1(26.709,3.513) 27.237,3.513 27.421,3.329 27.421,2.589 27.511,2.5 28.534,2.5 28.623,2.589 28.623,4.123 29.508,5.008 32.259,5.008 32.404,5.152 32.705,5.152 v1(32.743,5.19)
  Mid-Layer 4 w0.152: v1(32.743,5.19) 32.755,5.178 34.152,5.178 35.329,4 36.336,4 36.372,3.965 37.465,3.965 37.654,4.154 37.654,4.238 37.667,4.252 37.881,4.466 37.881,4.819 37.667,5.033 37.654,5.046 37.654,5.597 40.557,8.5 40.846,8.789 40.846,9.311 41.18,9.644 41.18,9.774 41.459,10.053 v1(41.459,10.134)
SPI_IO1: U3.F1 U16.2 | length 16.6
  Top Layer w0.152: U3.F1@41.502,9.449 41.512,9.438 41.512,9.012 v1(41.525,9)
  Mid-Layer 2 w0.152: v1(29.275,11.3) 29.275,10.736 29.325,10.686 29.325,10.175 33.162,6.338 35.981,6.338 36.051,6.268 37.214,6.268 38.159,7.213 38.978,7.213 39.853,8.088 40.592,8.088 41.504,9 v1(41.525,9)
SPI_IO2: R40.1 U3.G1 U16.3 | length 19.1
  Top Layer w0.152: U3.G1@42.148,9.451 v1(42.161,9.451)
  Mid-Layer 2 w0.152: v1(27.975,11.3) 29.023,10.252 29.023,9.977 33.514,5.486 36.859,5.486 38.123,6.75 39.322,6.75 39.572,7 40.835,7 42.104,8.269 42.104,8.5 42.104,9.394 v1(42.161,9.451)
SPI_IO3: R41.2 U3.G2 U16.7 | length 18.2
  Top Layer w0.152: v1(29.383,3.514) 29.383,3.847 29.472,3.937 29.904,3.937 29.993,4.026 29.993,4.107 30.125,4.239 31.287,4.239 31.602,3.924 32.223,3.924 32.303,4.004 32.413,4.004 32.671,4.262 v1(32.724,4.262)
  Mid-Layer 4 w0.152: v1(32.724,4.262) 32.724,4.265 33.062,4.603 33.397,4.603 34.669,3.331 37.259,3.331 38.184,4.256 38.184,4.9 41.149,7.865 41.149,8.5 41.149,9.177 41.582,9.61 41.656,9.61 v1(42.147,10.102)
TEMP_SCL: R73.2 U11.41 U17.3 | length 26.9
  Top Layer w0.152: v1(34.111,32.365) 35.723,32.365 37.186,30.902 v1(38.604,30.902) ; v1(34.475,41.2) 34.531,41.256 34.929,41.256 36.323,42.651 36.721,42.651 37.109,42.263 37.692,42.263 38.104,42.675 38.104,43.258 38.064,43.298 38.064,46.354 38.728,47.018 U11.41@39.72,47.018
  Mid-Layer 4 w0.152: v1(34.111,32.365) 32.934,33.543 32.934,37.308 33.128,37.502 33.128,39.853 v1(34.475,41.2)
  Bottom Layer w0.152: R73.2@38.537,29.319 38.537,30.836 v1(38.604,30.902)
TEMP_SDA: R74.2 U11.42 U17.4 | length 24.9
  Top Layer w0.152: v1(34.475,41.84) 34.485,41.85 35.095,41.85 36.198,42.954 36.846,42.954 37.235,42.565 37.567,42.565 37.802,42.8 37.802,43.133 37.695,43.24 37.695,44.237 37.588,44.344 37.588,46.588 38.781,47.781 39.583,47.781 U11.42@39.72,47.918
  Mid-Layer 4 w0.152: v1(34.475,41.84) 34.465,41.84 32.632,40.007 32.632,33.208 v1(34.955,30.885)
  Bottom Layer w0.152: v1(34.955,30.885) 34.973,30.902 v1(36.562,30.902)
USB_D_N: D5.3 USBC1.A7 USBC1.B7 | length 6.9
  Top Layer w0.152: D5.3@50.589,20.93 50.648,20.989 50.806,20.989 50.884,21.067 51.218,21.067 51.454,20.831 51.454,20.77 51.543,20.68 USBC1.A7@53.359,20.68 ; USBC1.B7@53.29,19.646 53.319,19.676 54.897,19.676 v1(54.926,19.705) ; USBC1.A7@53.29,20.644 53.304,20.63 54.399,20.63 v1(54.413,20.616)
  Mid-Layer 4 w0.152: v1(54.413,20.616) 54.469,20.561 54.469,20.163 v1(54.926,19.705)
USB_D_P: D5.1 USBC1.A6 USBC1.B6 | length 7.1
  Top Layer w0.152: D5.1@50.589,19.93 51.111,19.93 51.364,20.183 USBC1.A6@53.359,20.183 ; USBC1.A6@53.29,20.147 53.312,20.124 54.617,20.124 54.786,20.294 54.939,20.294 v1(54.996,20.351) ; USBC1.B6@53.29,21.145 53.344,21.199 54.434,21.199 v1(54.488,21.252)
  Mid-Layer 4 w0.152: v1(54.488,21.252) 54.55,21.252 54.996,20.806 v1(54.996,20.351)
USBP_D_N: D5.4 U3.A8 | length 69.6
  Top Layer w0.152: D5.4@49.914,20.93 49.926,20.942 v1(49.926,21.05)
  Mid-Layer 2 w0.152: v1(33.429,14.003) 33.772,14.346 34.568,14.346 34.843,14.071 35.76,14.071 36.022,14.333 37.281,14.333 37.345,14.333 37.67,14.007 38.238,14.007 v1(38.242,14.004)
  Mid-Layer 4 w0.152: v1(33.429,14.003) 33.093,13.666 33.093,13.543 32.962,13.413 32.913,13.413 31.566,12.066 31.566,10.615 30.955,10.005 30.955,1.97 32.332,0.594 53.668,0.594 57.906,4.832 57.906,11.084 57.297,11.694 57.297,12.449 57.386,12.538 57.568,12.538 57.833,12.803 57.833,13.176 57.829,13.18 57.829,13.306 57.884,13.362 57.884,14.45 57.231,15.102 57.231,15.769 57,16 57,16.575 55.07,18.505 54.227,18.505 54.222,18.5 52.397,18.5 50.367,20.53 50.247,20.53 49.983,20.795 49.983,20.993 v1(49.926,21.05)
USBP_D_P: D5.6 U3.B8 | length 67.2
  Mid-Layer 2 w0.152: v1(33.766,13.548) 34.157,13.939 34.4,13.939 34.675,13.665 35.928,13.665 36.19,13.926 37.177,13.926 37.281,13.822 37.502,13.601 37.902,13.601 37.905,13.597 38.499,13.597 v1(38.9,13.998)
  Mid-Layer 4 w0.152: v1(33.766,13.548) 33.474,13.256 33.38,13.256 33.131,13.006 33.081,13.006 31.972,11.897 31.972,10.447 31.362,9.837 31.362,2.138 32.5,1 53.5,1 57.5,5 57.5,10.916 56.89,11.526 56.89,12.617 56.94,12.667 56.94,12.793 56.93,12.803 56.93,13.176 57.194,13.441 57.388,13.441 57.477,13.53 57.477,14.281 56.825,14.934 56.825,15.601 56.594,15.832 56.594,16.406 54.901,18.099 54.396,18.099 54.391,18.094 52.229,18.094 50.279,20.044 50.109,20.044 49.995,19.93 v1(49.914,19.93)
VBAT: C3.1 C15.1 C16.1 C19.1 C50.1 C102.1 C105.1 C106.1 L6.1 L7.1 Q1.2 R12.2 R58.2 U1.10 U1.11 U5.1 U5.10 U6.7 U7.7 U8.10 U10.10 U14.6 U15.6 | length 70.6
  Top Layer w0.508: v1(37.878,27.819) 37.934,27.875 40.031,27.875 40.102,27.804 40.117,27.804 40.354,27.567 40.354,27.552 41.006,26.9 45.687,26.9 46.337,26.25 50.395,26.25 50.967,26.822 50.967,26.897 C102.1@51.088,27.018 51.088,28.621 L6.1@50.695,29.013 ; L7.1@47.5,36.474 47.323,36.652 v1(45.631,36.652) 46,36.283 46,35.193 46.462,34.731 46.462,34.321 46.5,34.283 46.5,34 47,33.5 49.202,33.5 49.351,33.649 49.5,33.5 ; C50.1@47.775,40.5 47.775,40.425 47.896,40.304 47.971,40.304 48.275,40 48.435,40 49.5,38.935 49.5,33.5 ; C50.1@47.896,40.621 47.896,41.161 48.298,41.563 48.298,41.896 v1(48.379,41.977) ; v1(48.974,29.348) 50.361,29.348 L6.1@50.695,29.013 ; v1(51.574,35.267) 51.574,34.47 51.886,34.158 51.886,33.914 52,33.8 52,32.5 ; C105.1@52.775,40.425 52.896,40.304 53.196,40.304 53.5,40 55.505,40 ; C105.1@52.775,40.5 52.896,40.621 52.896,41.161 53.298,41.563 53.298,41.938 v1(53.336,41.976) ; C3.1@53.029,30.851 52.954,30.851 52.379,31.426 52.379,32.121 52,32.5 ; C3.1@53.15,30.73 53.075,30.73 C3.1@52.954,30.609 ; C3.1@53.196,30.971 55.113,32.888 ; 54,29.85 53.956,29.894 53.956,29.999 53.346,30.609 C3.1@52.954,30.609 ; 55.001,39.496 54.757,39.252 54.757,38.583 54.749,38.575 54.749,37.49 54.986,37.253 55.069,37.253 55.407,36.915 55.407,36.603 55.528,36.482 C16.1@55.603,36.482 ; 55.197,39.282 55.505,39.282 55.505,40 ; v1(55.652,32.536) 55.464,32.536 55.113,32.888 ; v1(56.348,36.777) 56.175,36.603 55.724,36.603 C16.1@55.603,36.482 ; v1(56.388,42.833) 56.358,42.803 55.805,42.803 C19.1@55.684,42.682 55.684,40.18 55.505,40 ; 49.5,33.5 50,33 51.5,33 52,32.5 ; L6.1@50.695,29.013 51.121,29.013 51.998,29.891 52.235,29.891 C3.1@52.954,30.609 ; 55.113,32.888 55.673,33.448 55.673,36.413 C16.1@55.603,36.482
  Bottom Layer w0.508: R58.2@37.5,26.879 37.514,26.879 37.518,26.882 37.518,27.458 v1(37.878,27.819) ; R12.2@55.721,32.536 R12.2@55.757,32.5
VUSB: C2.1 D2.1 D3.5 D5.5 R8.2 R63.2 U1.13 USBC1.A4B9 USBC1.B4A9 | length 88.3
  Top Layer w0.152: v1(33.901,17.15) 33.901,17.098 33.553,16.75 33.553,14.447 34.074,13.926 37.218,13.926 37.444,13.7 37.444,13.499 37.718,13.225 v1(37.718,13.202)
  Top Layer w0.254: 49.309,20.691 49.57,20.43 D5.5@49.914,20.43
  Top Layer w0.508: 34,25.158 34,23.477 35.406,22.071 35.406,20.312 v1(35.271,20.177) ; 49.307,20.693 49.307,21.249 49.309,21.252 49.309,25 ; 51,22.878 USBC1.B4A9@53.319,22.878 ; 51.192,17.975 53.169,17.975 USBC1.A4B9@53.288,18.094 ; 54.235,25.801 54.661,25.801 54.699,25.839 ; 54.306,26 54.604,26.298 54.604,26.379 54.81,26.585 v1@54.81,28.147 ; v1(54.725,28.232) 54.821,28.328 54.965,28.328
  Top Layer w0.762: v1(25.28,15.675) 25.28,15.812 25.594,16.127 v1(25.678,16.127) 25.795,16.244 25.795,20.052 27.771,22.028 27.771,23.271 29.658,25.158 34,25.158 34.658,25.158 34.661,25.161 40.803,25.161 40.964,25 49.309,25 50.5,25 51,25.5 ; 51,22.878 51,25.5 ; 51.192,17.975 51.192,15.808 52.886,14.114 54.206,14.114 55.709,15.617 55.709,15.756 56.5,16.547 56.5,24.5 55.112,25.888 54.747,25.888 ; 54.306,26 54.235,25.928 52.243,25.928 51.815,25.5 51,25.5
  Mid-Layer 3 w0.762: v1(34.772,18.222) 35.271,18.721 v1(35.271,20.177)
  Bottom Layer w0.152: v1(33.901,17.15) 33.982,17.15 34.232,17.4 34.4,17.4 34.775,17.775 34.775,18.218 v1(34.772,18.222)
  other v1: 24.888,15.188
XTAL_24M_IN: C35.2 U3.A15 Y2.1 | length 4.6
  Top Layer w0.152: Y2.1@38.044,22.762 38.031,22.749 38.031,20.979 38.031,20.531 37.746,20.246 37.746,18.982 38.179,18.549 U3.A15@38.249,18.549
XTAL_24M_OUT: C36.2 U3.B15 Y2.3 | length 6.2
  Top Layer w0.152: v1(39.097,20.979) 39.097,21.956 38.752,22.301 38.752,23.222 38.909,23.378 38.986,23.378 39.369,23.762 Y2.3@39.394,23.762
  Mid-Layer 4 w0.152: v1(38.889,18.608) 38.836,18.608 38.647,18.797 38.615,18.797 38.408,19.004 38.408,20.29 v1(39.097,20.979)
XTAL_32K_IN: C33.2 U3.D15 Y1.1 | length 7.4
  Top Layer w0.152: v1(43.6,21) 43.827,21.227 43.827,21.702 43.923,21.798 Y1.1@43.923,23.147
  Mid-Layer 4 w0.152: v1(40.197,18.556) 40.197,19.576 40.695,20.075 41.509,20.075 42.509,21.076 43.035,21.076 43.111,21 v1(43.6,21)
XTAL_32K_OUT: C34.1 U3.D16 Y1.2 | length 4.8
  Top Layer w0.152: U3.D16@40.2,19.199 40.2,19.253 40.36,19.413 40.36,19.433 41.596,20.67 41.596,20.836 41.76,21 41.8,21 41.8,22.769 Y1.2@41.423,23.147
pads on no net: J4.11 J4.12 J4.14 J4.15 J5.11 J5.12 J5.14 J5.15 LED1.3 LED2.3 LED3.2 LED4.3 LED5.3 LED6.2 LED7.2 LED8.3 LED9.3 LED10.2 LED11.2 LED12.3 LED13.3 LED14.2 LED15.2 LED16.2 U1.17@56.1,29.75 U2.4 U2.5 U2.6 U3.A1 U3.A2 U3.A7 U3.A9 U3.A16 U3.B1 U3.B2 U3.B6 U3.B10 U3.B11 U3.B12 U3.B13 U3.C2 U3.C10 U3.C11 U3.E13 U3.F13 U3.H1 U3.H2 U3.J1 U3.J2 U3.J3 U3.K3 U3.M14 U3.N13 U3.N14 U3.N15 U3.P4 U3.P5 U3.P10 U3.P11 U3.P12 U3.P13 U3.P15 U3.P16 U3.R3 U3.R4 U3.R5 U3.R6 U3.R7 U3.R8 U3.R9 U3.R10 U3.R11 U3.R12 U3.R13 U3.R14 U3.R15 U3.R16 U3.T1 U3.T3 U3.T4 U3.T5 U3.T6 U3.T7 U3.T8 U3.T9 U3.T10 U3.T11 U3.T12 U3.T14 U3.T15 U3.T16 U5.5 U8.5 U11.4 U11.5 U11.8 U11.10 U11.11 U11.21 U11.23 U11.26 U11.29 U11.30 U11.32 U11.34 U11.35 U11.44 U13.HOLE U14.7@48,29.55 U14.7@48,30.45 U15.7@44.621,36.913 U15.7@44.621,37.813 U17.1 U17.6 USBC1.A8 USBC1.B8 USBC1.HOLE USBC2.A8 USBC2.B8 USBC2.HOLE

## Polygon pours and split planes (outlines as drawn)
3V3 on Mid-Layer 3 "3V3_L04_P021" (solid, pour order 21): 24.5,14 37,14 37,0.5 25,0.5 24.5,1
1V8 on Mid-Layer 3 "1V8_L04_P013" (solid, remove dead copper, pour order 13): 35.818,16.671 35.818,18.45 39.954,20.672 40.52,20.311 41.107,19.519 41.167,18.215 43.096,18.294 43.096,16.671 42.903,16.478 41.278,16.478 41.278,16.475 40.85,16.046 40.85,15.525 41.147,15.525 41.167,13.739 40.914,13.551 40.939,11.001 41.201,10.74 44.358,10.783 46.174,10.808 46.484,13.884 46.502,15.767 46.931,17.55 47.376,20.951 47.3,24.673 47.633,24.681 48.921,24.708 49.095,24.673 49.034,24.472 50.725,18.45 50.725,6.1 43.407,6.1 37,6.1 37,13.551
3V3 on Mid-Layer 3 "3V3_L04_P017" (solid, remove dead copper, pour order 17): 45.701,16.299 46.397,16.299 46.397,15.559 46.484,15.156 46.484,13.884 45.147,12.099 44.962,11.661 44.276,10.975 43.575,10.975 43.575,12.247 43.575,13.477 43.7,15.351 45.018,15.351
1V1 on Mid-Layer 3 "1V1_L04_P011" (solid, remove dead copper, pour order 11): 46.077,22.41 44.225,20.725 41.151,19.574 41.205,18.236 43.25,18.236 43.25,16.5 41.3,16.5 40.975,16.175 40.975,15.525 45.116,15.525 46.521,17.017 47.424,22.41
3V3 on Mid-Layer 2 "3V3_L03_P016" (solid, remove dead copper, pour order 16): 41.334,11.759 44.391,11.759 44.39,10.921 45.018,10.917 46.905,8.835 48.996,7.423 51.542,6.202 51.542,5.45 51.659,4.759 51.371,1.476 24.404,1.476 24.57,13.649 24.503,22.643 24.57,29.728 24.5,42.558 24.5,49.65 31.875,46.075 47.475,46.075 47.475,27.55 46.5,26.575 46.5,23 44.118,20.618 42.116,19.561 42.116,17.058 40.16,15.775 40.063,12.224 40.947,12.146
1V8 on Mid-Layer 2 "1V8_L03_P014" (solid, remove dead copper, pour order 14): 46.767,22.942 49.272,22.942 49.1,23.114 49.1,24.464 51.05,27.143 51.05,43.475 52.35,44.775 52.35,46.725 50.4,46.725 48.125,44.45 48.125,28.2 46.767,26.842
1V1 on Mid-Layer 2 "1V1_L03_P012" (solid, remove dead copper, pour order 12): 49.272,24.603 49.272,22.942 46.767,22.942 45.525,21.7 45.525,21.05 46.175,21.05 47.582,19.643 49.272,19.633 54.625,22.675 54.625,41.2 56.9,43.475 58.525,43.475 59.175,44.125 59.175,47.375 56.575,47.375 51.05,41.85 51.05,27.05
0V8 on Mid-Layer 2 "0V8_L03_P010" (solid, remove dead copper, pour order 10): 60,40.704 54.95,40.704 54.95,22.62 50.7,20.179 50.818,16.759 45.908,16.813 45.141,16.491 44.663,15.798 41.347,15.798 40.65,15.101 40.65,14.225 40.85,14.225 40.85,12.8 40.65,12.6 41.3,11.95 41.347,11.759 42.272,11.759 43.024,12.374 44.917,12.374 44.917,12.642 45.215,12.673 45.864,13.212 60,13.575
0V8_MIPI on Mid-Layer 2 "0V8_MIPI_L03_P006" (solid, remove dead copper, pour order 6): 45.672,12.074 45.2,11.603 45.2,10.975 48.775,7.4 55.275,7.4 56.575,8.7 56.575,9.025 56.575,12.925 55.275,12.925 52.35,10 50.4,10 48.585,12.074
1V8_MIPI on Mid-Layer 2 "1V8_MIPI_L03_P007" (solid, remove dead copper, pour order 7): 51.057,13.25 50.263,13.3 49.425,12.925 48.992,13.25 45.831,13.169 45.2,12.74 44.98,12.821 44.919,12.666 44.396,12.429 44.396,11.936 44.396,11.132 45.2,11.132 45.2,11.625 45.649,12.099 45.649,12.074 47.07,12.074 48.574,12.074 48.986,11.625 51.057,11.625
1V8_DDR on Mid-Layer 2 "1V8_DDR_L03_P009" (solid, remove dead copper, pour order 9): 42.6,16.175 44.752,16.175 44.919,16.175 45.329,16.814 45.73,16.786 48.881,16.814 50.4,16.175 50.4,17.15 48.614,17.876 46.692,17.876 44.266,17.876 42.6,17.423
VBAT on Top Layer "VBAT_L01_P020" (solid, pour order 20): 45.812,36.879 45.933,37 48.5,37 48.5,35.815 48.502,35.812 48.281,35.591 47.369,35.591 47.369,33.189 46.174,33.189 45.812,34.217
VBAT on Top Layer "VBAT_L01_P019" (solid, remove dead copper, pour order 19): 49.019,29.869 52,30 52,32.419 49.019,32.468 48.997,34.798 56.5,34.798 56.5,32 55,32 54,31 54.171,30.829 54.171,29.014 54,28.668 54,28.318 53.791,28.318 53.57,28.318 52.818,28.318 50.5,26 46,26 46,26.5 45.5,27 45.5,27.5 49,27.5
BAT on Top Layer "BAT_L01_P018" (solid, remove dead copper, pour order 18): 59.649,33.514 59.635,33.5 57,33.5 57,32 58,31 58,29.5 58.5,29.5 58.706,29.706 59.649,29.706
GND on Top Layer "GND_L01_P001" (solid, remove dead copper, pour order 1): 24.5,54 36.627,54 36.627,53.433 35.706,52.512 24.5,52.512
GND on Top Layer "GND_L01_P002" (solid, remove dead copper, pour order 2): 38.751,53.994 38.751,52.457 38.812,52.396 60,52.396 60,54.005
GND on Mid-Layer 1 "GND_L02_P004" (solid, remove dead copper, pour order 4): 24.5,54 59.95,54 59.95,0.301 24.5,0.301
GND on Bottom Layer "GND_L06_P000" (solid, remove dead copper, pour order 0): 24.5,54 60,54 60,0.3 24.5,0.3

## Keep-outs
Keep-Out Layer:
  lines w0.3: -0.65,0.5 ccw(c-0.5,0.5) -0.606,0.394 ; -0.65,0.5 ccw(c-0.5,0.5) -0.606,0.394 ; -0.65,0.5 -0.65,65 ; -0.65,65 cw(c-0.5,65) -0.5,65.15 ; -0.65,65 cw(c-0.5,65) -0.5,65.15 ; -0.606,0.394 -0.606,0.394 ; -0.606,0.394 -0.106,-0.106 ; -0.5,65.15 60.5,65.15 ; -0.106,-0.106 ccw(c0,0) 0,-0.15 ; -0.106,-0.106 -0.106,-0.106 ccw(c0,0) 0,-0.15 ; 0,-0.15 60.5,-0.15 ; 60.5,-0.15 ccw(c60.5,0) 60.65,0 ; 60.5,-0.15 ccw(c60.5,0) 60.65,0 ; 60.5,65.15 cw(c60.5,65) 60.65,65 ; 60.5,65.15 cw(c60.5,65) 60.65,65 ; 60.65,0 60.65,65

## Other copper
Top Layer:
  rectangle net 0V8: 57.085,38.5 58.566,40.5
  rectangle net 3V3: 46.751,5.5 47.519,6.3
  rectangle net NetD8_2: 45.238,38.05 46.514,38.656
  rectangle net VBAT: 46.771,32.468 49.019,34.116
  rectangle net VBAT: 54.502,38.992 55.5,40
  rectangle net VBAT: 53.097,40.23 53.501,41.563
  rectangle net VBAT: 48.03,40.152 48.5,41.5
  rectangle net NetC104_1: 43.297,33.837 44.609,35.5
  rectangle net NetD7_2: 48.522,30.687 49.86,31.753
  rectangle net NetD8_2: 45.367,37.898 46.648,38.263
  rectangle net NetL1_1: 57.243,35.415 57.884,36.5
  rectangle net NetD2_2: 27.978,15.043 29.125,16.303
  rectangle net VUSB: 54.477,27.983 55.452,28.673
  rectangle net VUSB: 24.701,15.001 25.773,16.306
  rectangle net VBAT: 53.832,29.359 54.997,30.121
  rectangle net BAT: 57.204,29.372 58.489,30.134
Bottom Layer:
  rectangle net 1V8: 50.861,45 51.506,46.121
  rectangle net 1V8: 52.306,44 53.17,44.484
  rectangle net 0V8: 57.346,39.5 58.539,40.506
  rectangle net 0V8: 40.65,12.53 42.308,13.575
  rectangle net 3V3: 45.839,45.016 46.5,46.11
  rectangle net 3V3: 47.257,43.926 48.203,44.616
  rectangle net 3V3: 35.478,5.202 36.371,6.127
  rectangle net NetD7_2: 48.826,30.502 49.232,30.896
  rectangle net VBAT: 47.438,41.787 48.49,42.181
  rectangle net VBAT: 56.208,36.593 57.082,36.893
  rectangle net NetL2_1: 57.315,42.17 57.727,43
  rectangle net 3V3_SLEEP: 53.145,37.42 54.014,38.235
  rectangle net NetL3_2: 52.412,35.654 52.991,36.188
  rectangle net NetL1_1: 57.266,35.503 57.724,36.34
  rectangle net NetL3_1: 52.458,36.924 52.961,37.618
  rectangle net VBAT: 56.388,42.752 57,42.989
  rectangle net VBAT: 56.559,36.613 57.384,36.863
  rectangle net VBAT: 51.481,34.716 54,35.41
  region net 1V8: 50,44.5 52.29,44.5 51.517,45.273 50.909,45.273
  region net 3V3: 45,44.5 47.368,44.5 46.632,45.236 45.815,45.236
  region net 3V3_SLEEP: 52.399,38.963 51.321,37.886 53.483,37.886 53.501,37.904 53.252,38.153 53.252,38.982

## Silkscreen, mask and mechanical layers (free items; w line width, h text height)
Top Overlay:
  lines w0.254: 0,0 0,65 ; 0,27 23,27 ; 0,28 23,28 ; 5,0 5,65 ; 6,0 6,65 ; 11,0 11,65 ; 12,0 12,65 ; 17,0 17,65 ; 18,0 18,65 ; 23,0 23,65 ; 24,0 24,65

## Text inside footprints (layer, text, board x,y; h text height)
LED3: Top Overlay "-" at 2.04,39.36 h1 r270
LED6: Top Overlay "-" at 8.96,54.64 h1 r90
LED7: Top Overlay "-" at 8.04,39.36 h1 r270
LED10: Top Overlay "-" at 14.96,54.64 h1 r90
LED11: Top Overlay "-" at 14.04,39.36 h1 r270
LED14: Top Overlay "-" at 20.96,54.64 h1 r90
LED15: Top Overlay "-" at 20.04,39.36 h1 r270
LED16: Top Overlay "-" at 2.96,54.64 h1 r90